# Altium PCB middlePCB_rev4.PcbDoc
Units mil, origin at the board's own origin, x right, y up, seen from the top; angles counter-clockwise.
Board outline 3939.9 x 3936.9 mil, 2 copper layers (Top Layer, Bottom Layer); 64 components, 67 nets, 276 pads, 222 vias.
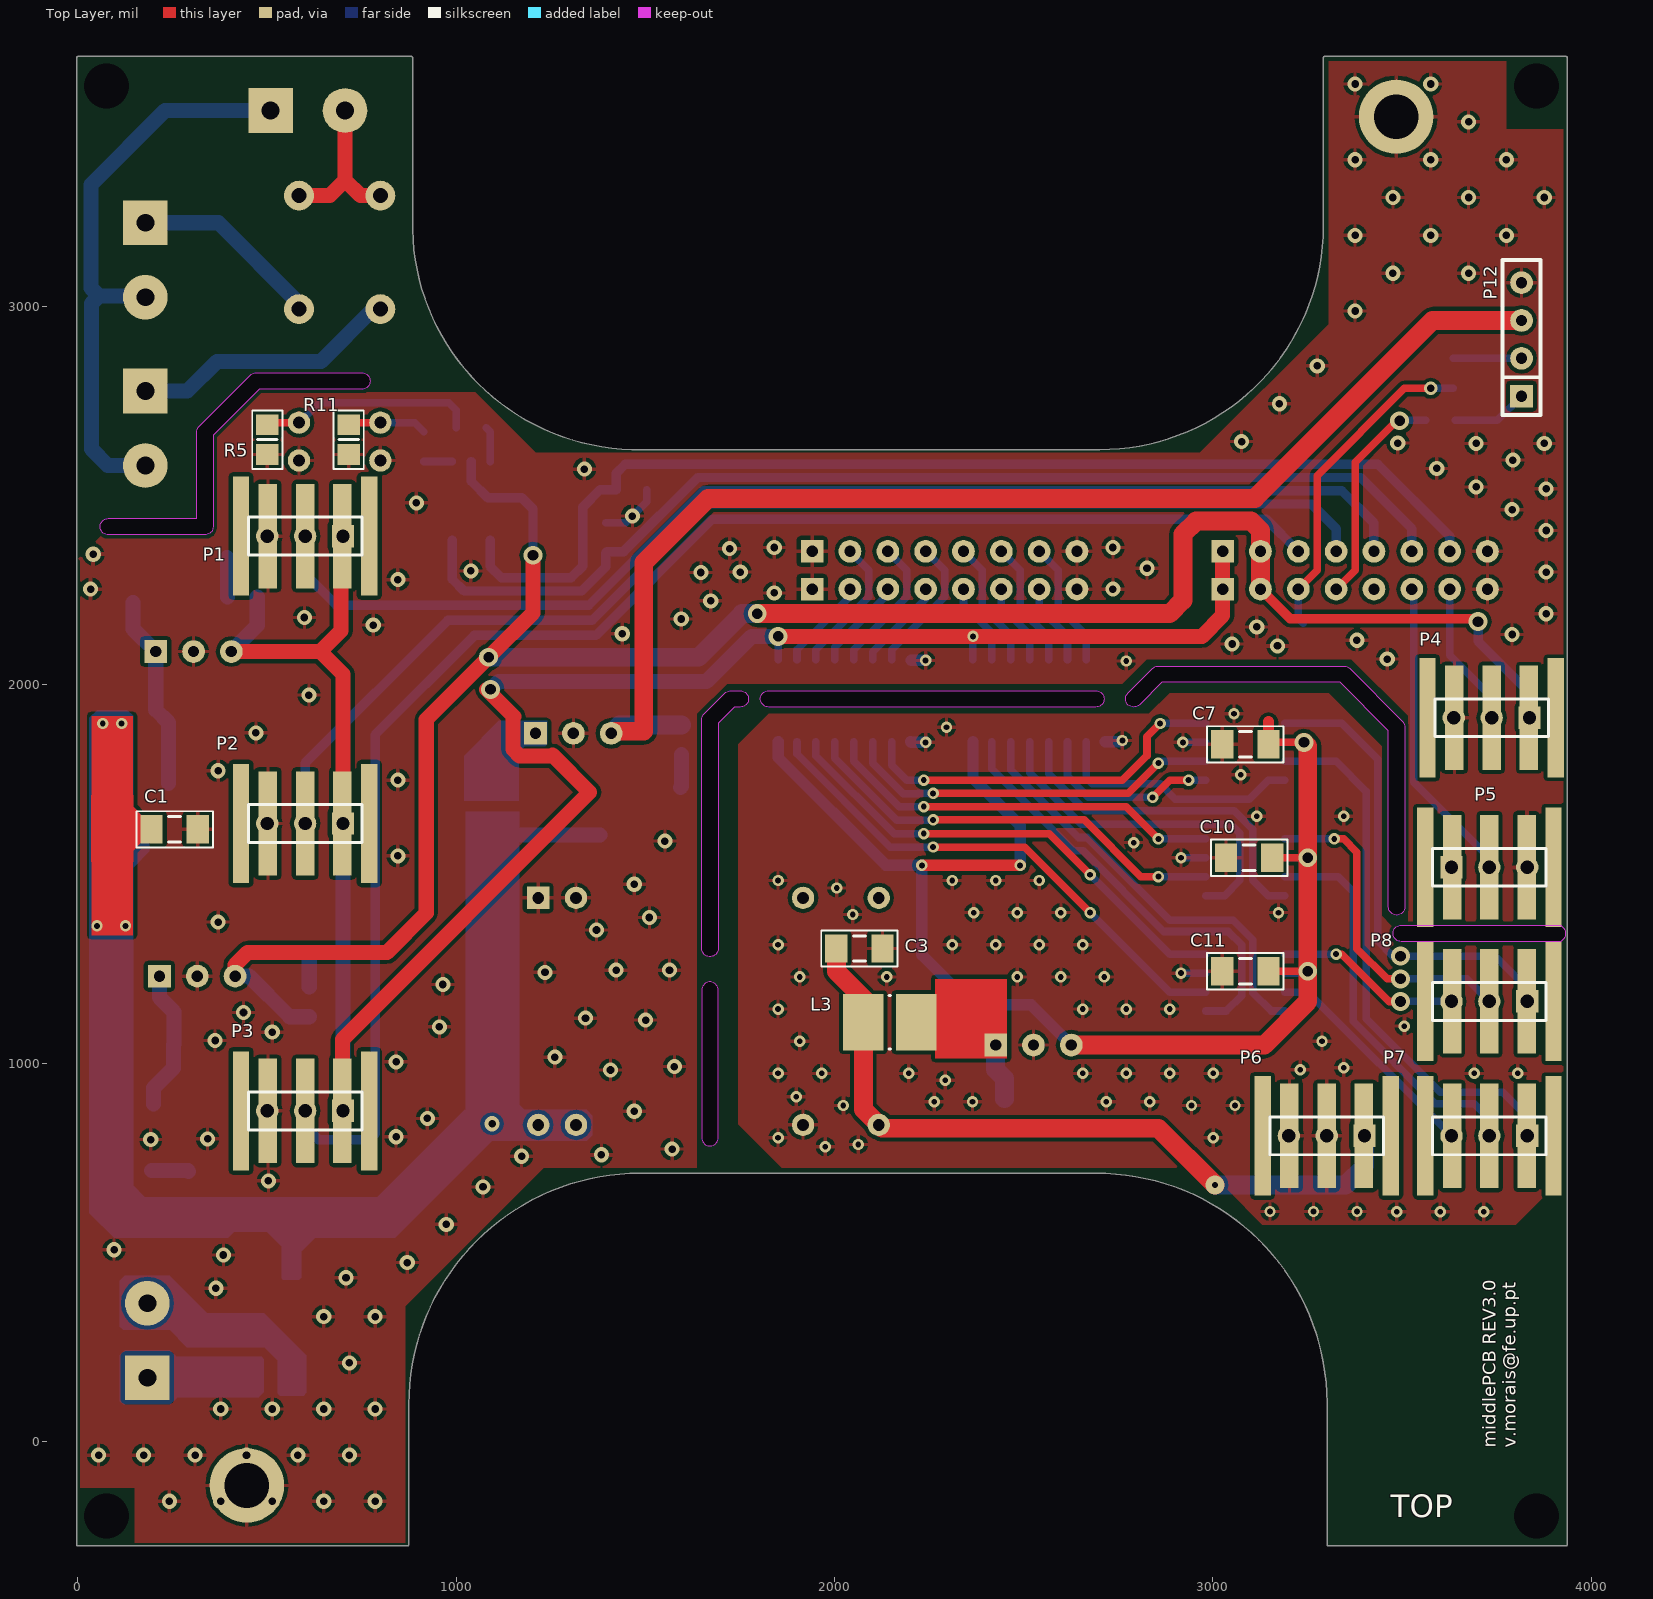
[diagram p0: Top Layer view]
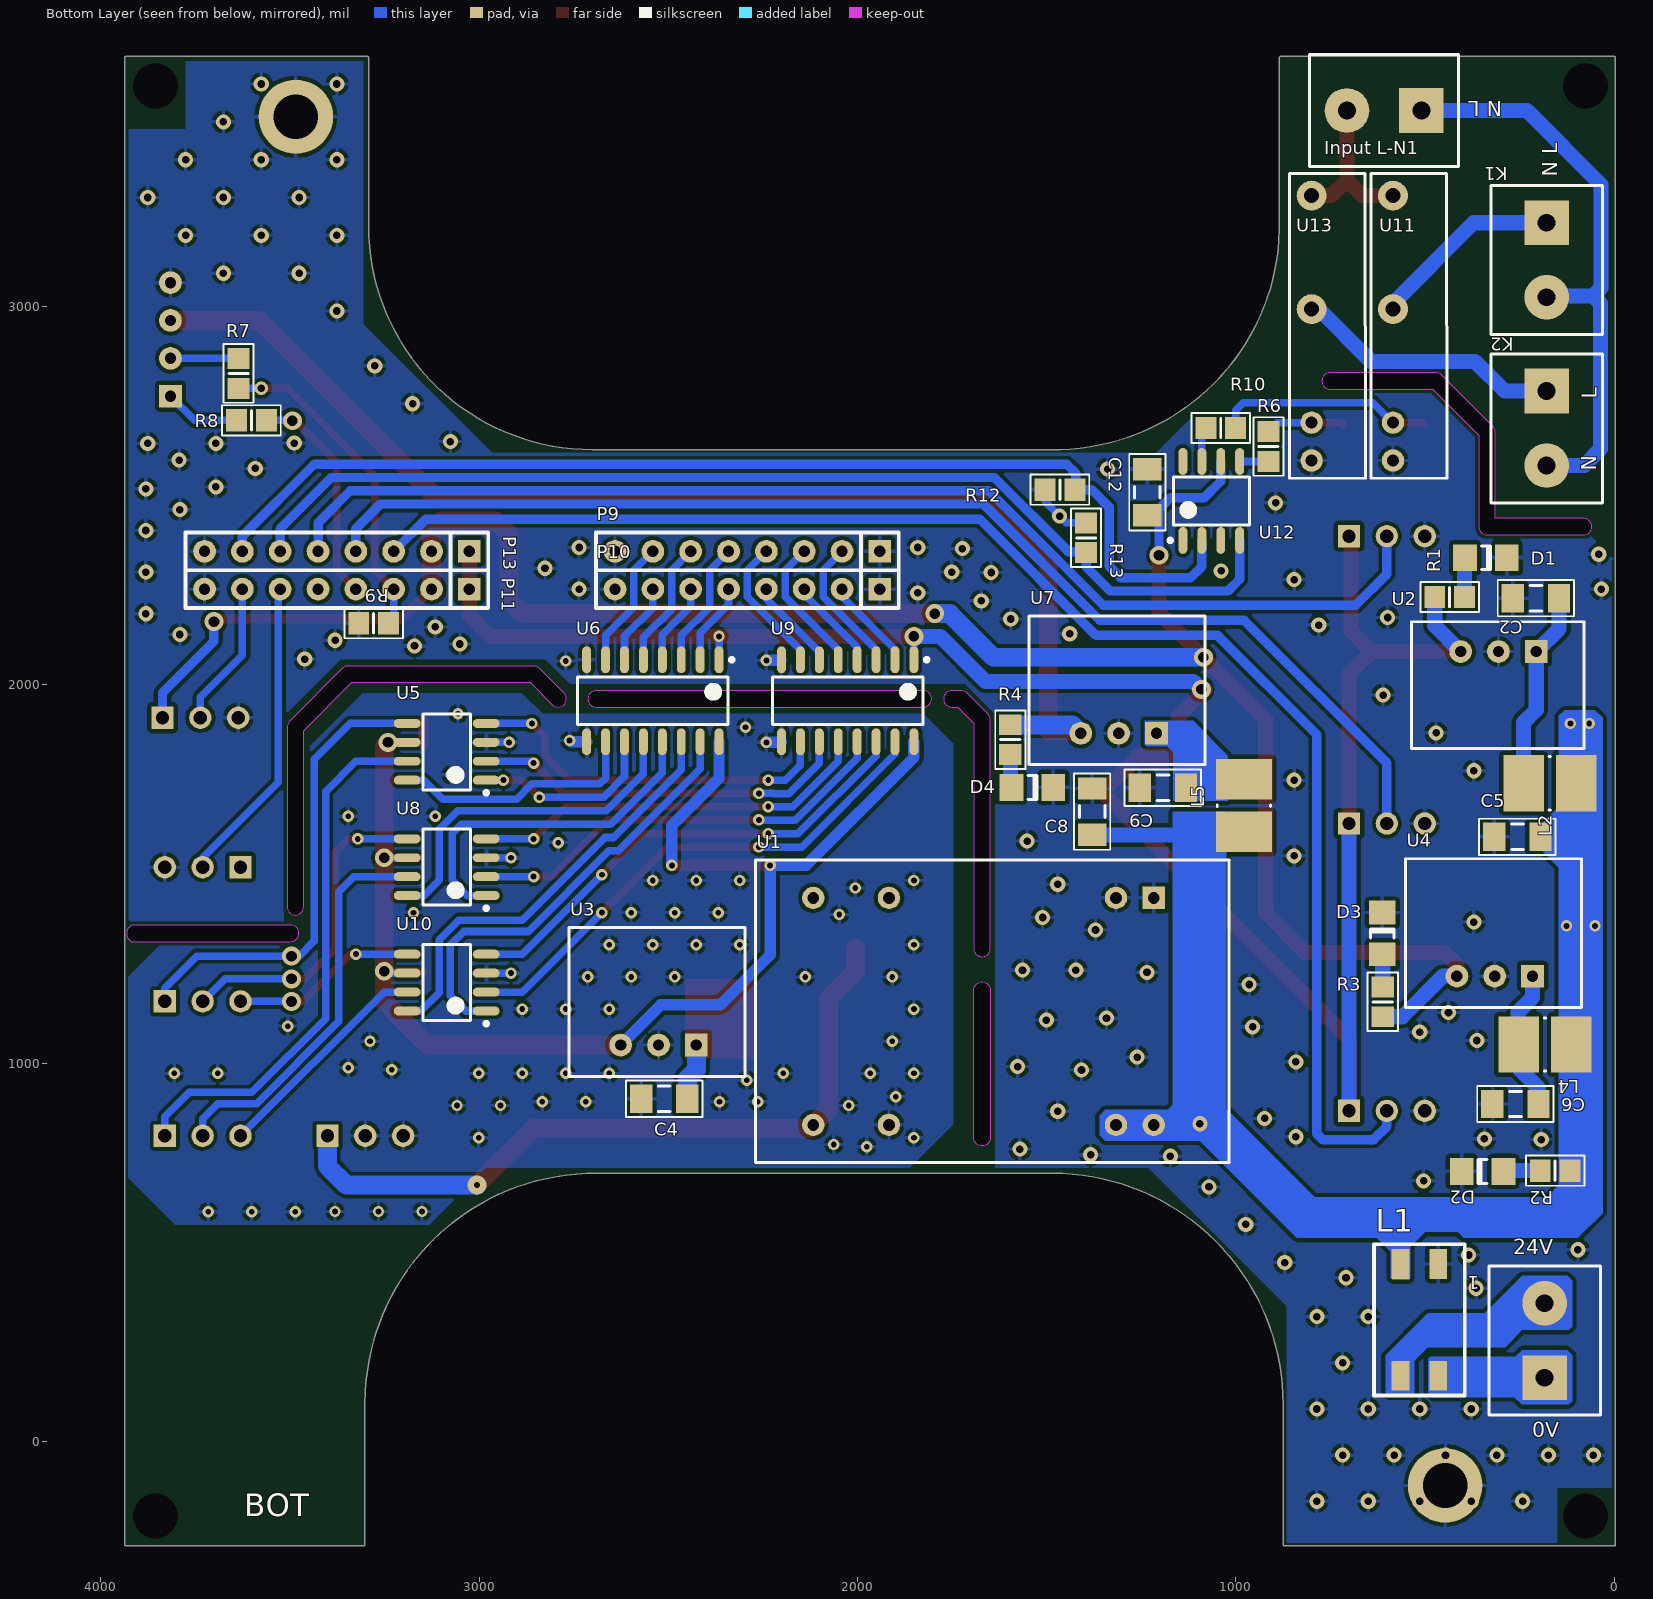
[diagram p1: Bottom Layer view, seen from below]
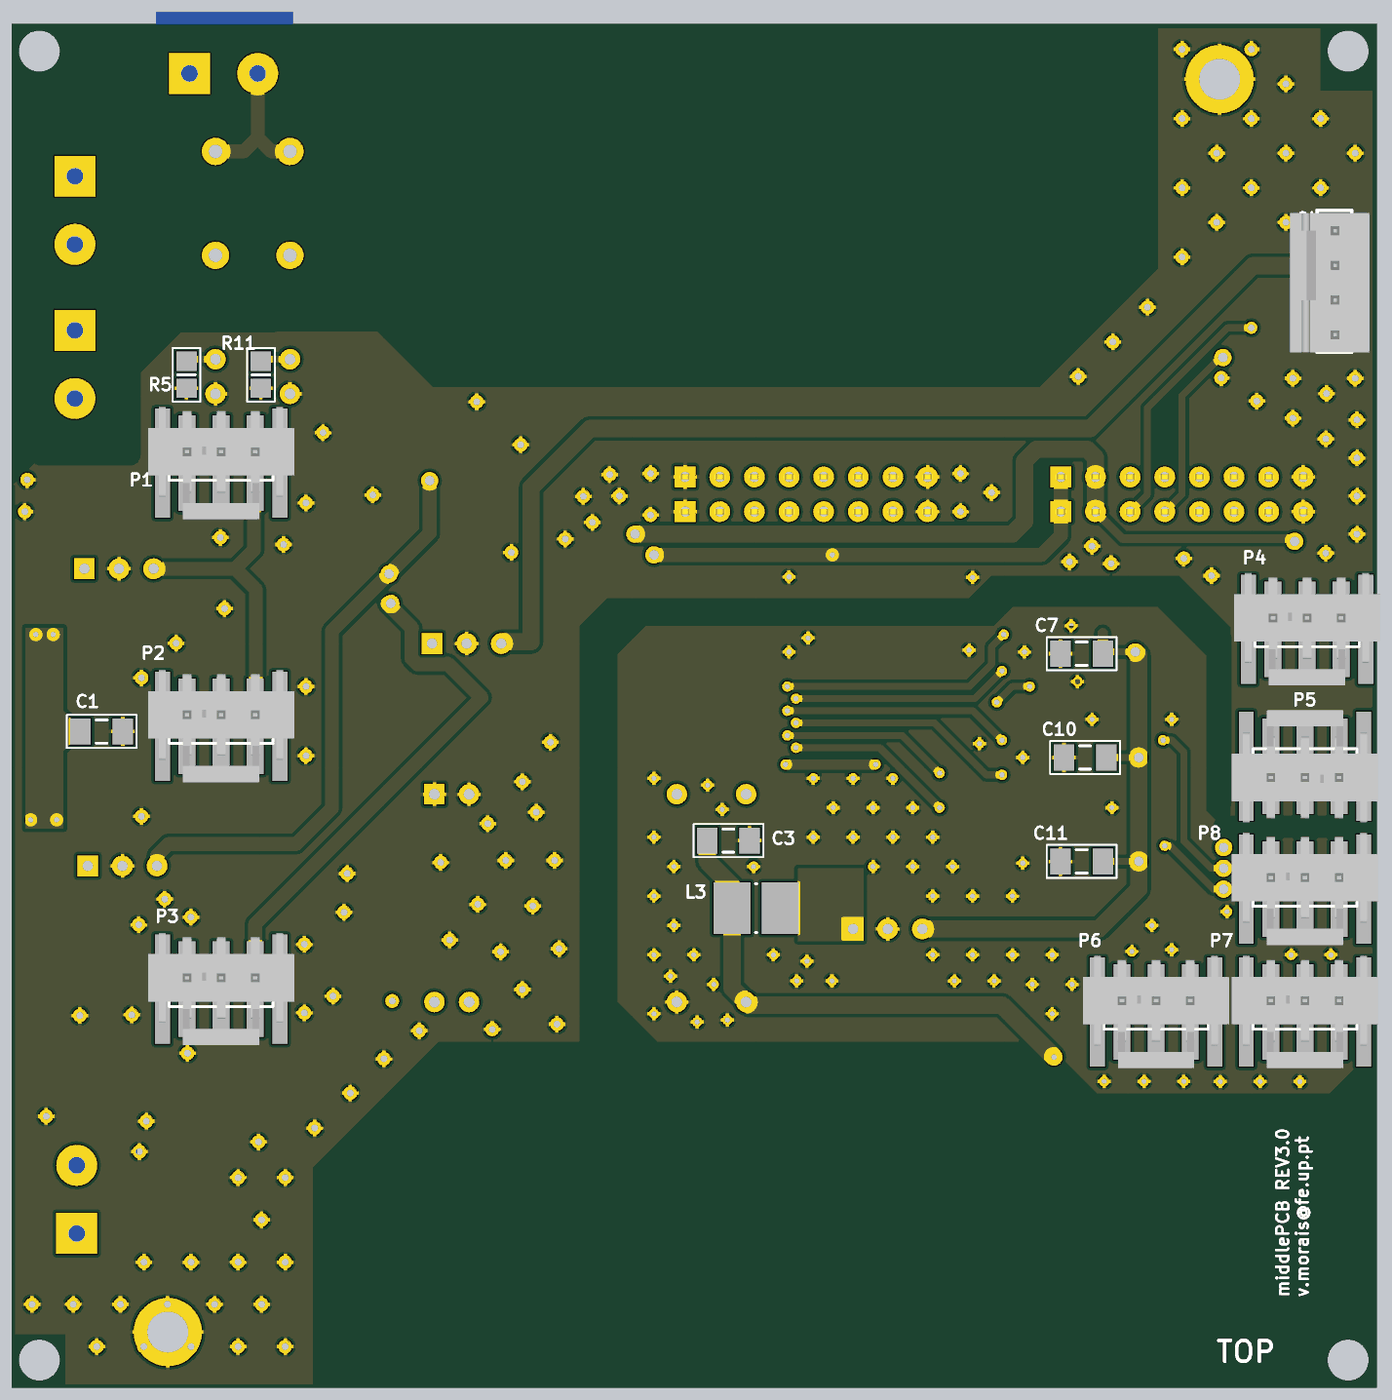
[diagram p2: 3D render of the assembled board from above, using the file's embedded part models]

## Layer stack, top to bottom
Top Solder: solder mask 0.4, Solder Resist, Dk 3.5
Top Layer: signal copper 1.4
Dielectric 1: dielectric 12.6, FR-4, Dk 4.8
Bottom Layer: signal copper 1.4
Bottom Solder: solder mask 0.4, Solder Resist, Dk 3.5

## Board outline
1,-275.95 871,-275.95 ccw(c871,-272) 874.95,-272 874.95,98 cw(c1486,98) 1486,709.05 2691,709.05 ccw(c2691,713) 2691.02,709.05 cw(c2693.5,100.5) 3302.05,102.99 3302.05,-272 ccw(c3306,-272) 3306,-275.95 3933,-275.95 ccw(c3933,-272) 3936.95,-272 3936.95,3657 ccw(c3933,3657) 3933,3660.95 3296,3660.95 ccw(c3296,3657) 3292.05,3657 3292.05,3210.51 cw(c2702.25,3211.75) 2701.01,2621.95 ccw(c2701,2618) 2701,2621.95 1491,2621.95 ccw(c1491,2618) 1490.92,2621.95 cw(c1478.5,3215.5) 884.95,3203.04 cw(c1478.5,3215.5) 884.95,3203.08 884.95,3203 884.95,3657 ccw(c881,3657) 881,3660.95 1,3660.95 ccw(c1,3657) -2.92,3656.5 ccw(c1,3656) -2.95,3656 -2.95,-272 ccw(c1,-272)
cut-out: 2806.32,1947.68 cw(c2791,1963) 2775.68,1978.32 2840.68,2043.32 cw(c2855.97,2028.06) 2856,2049.67 3346,2049.67 cw(c3346,2028) 3361.36,2043.29 3501.32,1903.32 cw(c3486.06,1888.03) 3507.67,1888 3507.67,1413 cw(c3486,1413) 3464.33,1413 3464.33,1879.02 3337.02,2006.33 2864.98,2006.33
cut-out: 1826,1941.33 cw(c1826,1963) 1826,1984.67 2691,1984.67 cw(c2691,1963) 2712.67,1963 cw(c2691,1963) 2691,1941.33
cut-out: 1649.33,803 ccw(c1671,803) 1692.67,803 1692.67,1193 ccw(c1671,1193) 1649.33,1193
cut-out: 3498.27,1321.33 cw(c3498.27,1343) 3498.27,1364.67 3919,1364.67 cw(c3907.42,1343) 3919,1321.33
cut-out: 81,2396.33 cw(c81,2418) 81,2439.67 314.33,2439.67 314.33,2668 cw(c336,2668) 320.71,2683.36 455.68,2818.32 cw(c470.97,2803.06) 471,2824.67 751,2824.67 cw(c751,2803) 772.67,2803 cw(c751,2803) 751,2781.33 479.98,2781.33 357.67,2659.02 357.67,2418 cw(c336,2418) 336,2396.33
cut-out: 1649.33,1303 1649.33,1908 cw(c1671,1908) 1655.71,1923.36 1655.68,1923.32 1710.68,1978.32 1710.64,1978.29 cw(c1726,1963) 1726,1984.67 1751,1984.67 cw(c1751,1963) 1772.67,1963 cw(c1751,1963) 1751,1941.33 1734.98,1941.33 1692.67,1899.02 1692.67,1303 cw(c1671,1303)

## Design rules (kind name [scope] priority, off if disabled: settings)
Clearance [All] p1: gap=10 ignorepadtopadclearanceinfootprint=FALSE
Height [All] p1: minheight=0 maxheight=10000 prefheight=500
HoleSize [All] p1: absolutevalues=TRUE maxlimit=1000 minlimit=7.87 maxpercent=80.000 minpercent=20.000
PlaneClearance [All] p1: clearance=100
PolygonConnect [All] p1: connectstyle=Relief reliefconductorwidth=10 reliefentries=4 polygonreliefangle="90 Angle" airgapwidth=10
RoomDefinition middlePCB_rev4 [InComponentClass('middlePCB_rev4')] p1: confinementstyle=ConfineIn formatcopy=TRUE lockcomponents=FALSE outline -1641.05,-3603.5 358.95,-3603.5 358.95,-2603.5 -1641.05,-2603.5
RoutingVias [All] p1: holewidth=28 width=50 viastyle="Through Hole" minholewidth=28 minwidth=50 maxholewidth=28 maxwidth=50
SilkToSilkClearance [All] p1: silktosilkclearance=1
SilkToSolderMaskClearance [IsPad] p1: minsilkscreentomaskgap=1 clearancetoexposedcopper=TRUE
SolderMaskExpansion [All] p1: expansion=4
Width [All] p1: maxlimit=150 minlimit=5 preferedwidth=20
25 further rules are at their usual default settings.

## Components (designator, comment, footprint, x,y, rotation, side; value= is the part's Value field where it differs from the comment)
1 "P 2p 5mm" connector1x2_parafuso 184,267 r90 bottom
C1 "C 10uF 1206 MLCC 50V X5R" CAPC_1206 256,1618 r180 top
C2 "C 10uF 1206 MLCC 50V X5R" CAPC_1206 207,2229 r180 bottom
C3 "C 10uF 1206 MLCC 50V X5R" CAPC_1206 2066,1303 r180 top
C4 "C 10uF 1206 MLCC 50V X5R" CAPC_1206 2511,906 r180 bottom
C5 "C 10uF 1206 MLCC 50V X5R" CAPC_1206 256,1598.31 r180 bottom
C6 "C 10uF 1206 MLCC 50V X5R" CAPC_1206 261,892 r180 bottom
C7 "C 10uF 1206 MLCC 50V X5R" CAPC_1206 3086,1842.68 r0 top
C8 "C 10uF 1206 MLCC 50V X5R" CAPC_1206 1380,1665 r270 bottom
C9 "C 10uF 1206 MLCC 50V X5R" CAPC_1206 1193,1728 r180 bottom
C10 "C 10uF 1206 MLCC 50V X5R" CAPC_1206 3096,1543 r0 top
C11 "C 10uF 1206 MLCC 50V X5R" CAPC_1206 3086,1243 r0 top
C12 "C 10uF 1206 MLCC 50V X5R" CAPC_1206 1234,2509 r270 bottom
D1 "IC LED 1206" DIODE_1206 339.12,2336 r180 bottom
D2 "IC LED 1206" DIODE_1206 348,714 r0 bottom
D3 "IC LED 1206" DIODE_1206 613,1343 r90 bottom
D4 "IC LED 1206" DIODE_1206 1538,1729 r180 bottom
"Input L-N1" "P 2p 5mm" connector1x2_parafuso 608.13,3518 r0 bottom
K1 "P 2p 5mm" connector1x2_parafuso 178.67,3123 r270 bottom
K2 "P 2p 5mm" connector1x2_parafuso 178.67,2678 r270 bottom
L1 "L 2A CM" FILTER-SMD_4P-L9.2-W6.0-TL 515,321.36 r90 bottom
L2 "IND RLS-126" "Inductor - RLS-126" 170,1740 r0 bottom
L3 "IND RLS-126" "Inductor - RLS-126" 2146,1108 r0 top
L4 "IND RLS-126" "Inductor - RLS-126" 183,1049 r0 bottom
L5 "IND RLS-126" "Inductor - RLS-126" 979,1681 r90 bottom
P1 "P 8p 2.54 SR DW 3P" MOLEX_3p_105431_1103 601,2393 r180 top locked
P2 "P 8p 2.54 SR DW 3P" MOLEX_3p_105431_1103 601,1633.5 r180 top locked
P3 "P 8p 2.54 SR DW 3P" MOLEX_3p_105431_1103 601,874 r180 top locked
P4 "P 8p 2.54 SR DW 3P" MOLEX_3p_105431_1103 3737,1913 r180 top locked
P5 "P 8p 2.54 SR DW 3P" MOLEX_3p_105431_1103 3731,1518 r0 top locked
P6 "P 8p 2.54 SR DW 3P" MOLEX_3p_105431_1103 3301,808 r180 top locked
P7 "P 8p 2.54 SR DW 3P" MOLEX_3p_105431_1103 3731,808 r180 top locked
P8 "P 8p 2.54 SR DW 3P" MOLEX_3p_105431_1103 3731,1163.41 r180 top locked
P9 "P 8p 2.54 SR DW 8P" "Header 8x1 8.5mm" 1941,2353 r0 bottom
P10 "P 8p 2.54 SR DW 8P" "Header 8x1 8.5mm" 1941,2253 r0 bottom
P11 "P 8p 2.54 SR DW 8P" "Header 8x1 8.5mm" 3026,2253 r0 bottom
P12 "P 4p 2.54 MOL FAN" "HEADER 4p molex" 3816,2763 r90 top
P13 "P 8p 2.54 SR DW 8P" "Header 8x1 8.5mm" 3026,2353 r0 bottom
R1 "R 150 1/8W 0805 1%" RESC_0805 435,2232 r0 bottom
R2 "R 2k7 1/8 0805 1%" RESC_0805 156,716 r180 bottom
R3 "R 330 1/8 0805 1%" RESC_0805 612,1162 r270 bottom
R4 "R 1k2 1/8 0805 1%" RESC_0805 1596,1855 r90 bottom
R5 "R 0 1/8W 0805" RESC_0805 501,2648 r270 top
R6 "R 10 1/8W 0805 1%" RESC_0805 914,2630 r90 bottom
R7 "R 0 1/8W 0805" RESC_0805 3636,2823 r270 bottom
R8 "R 0 1/8W 0805" RESC_0805 3602,2699 r180 bottom
R9 "R 0 1/8W 0805" RESC_0805 3279,2163 r180 bottom
R10 "R 10 1/8W 0805 1%" RESC_0805 1040,2679 r180 bottom
R11 "R 0 1/8W 0805" RESC_0805 716,2648 r270 top
R12 "R 0 1/8W 0805" RESC_0805 1465,2516.06 r180 bottom
R13 "R 0 1/8W 0805" RESC_0805 1396,2388.69 r270 bottom
U1 "IC DC/DC 15V ISO" "MeanWell SCWNo6" 1217,837 r270 bottom
U2 "IC DC/DC 3V3" "DC/DC - R-78E3.3" 79.62,2166.74 r0 bottom
U3 "IC DC/DC 5V" "DC/DC - OKI-78SR-E" 2762.22,965.32 r180 bottom
U4 "IC DC/DC 5V" "DC/DC - OKI-78SR-E" 552.06,1147.32 r180 bottom
U5 "IC Driver 5A Dual ENA IX4340" SOIC-MIC4126 3086,1823 r0 bottom
U6 "IC ISO SI8660" SOIC127P610X155-16N 2541,1958 r270 bottom
U7 "IC DC/DC 12V" "DC/DC - OKI-78SR-E" 1546.22,1789.32 r180 bottom
U8 "IC Driver 5A Dual ENA IX4340" SOIC-MIC4126 3086,1518 r0 bottom
U9 "IC ISO SI8660" SOIC127P610X155-16N 2026,1958 r270 bottom
U10 "IC Driver 5A Dual ENA IX4340" SOIC-MIC4126 3086,1213 r0 bottom
U11 "IC Relay 5A 5V 5x20mm" "Relay - G6DN" 584.79,2693 r90 bottom
U12 "IC DUAL MOS DRIVER MIC4127" SOIC-MIC4126 1065,2486 r90 bottom
U13 "IC Relay 5A 5V 5x20mm" "Relay - G6DN" 799.79,2693 r90 bottom

## Footprints (in the part's own frame and the unit in brackets; to place one, negate y for a bottom-side part, rotate by r counter-clockwise, add the part's x,y. Pads: shape width x height; smd on the part's side, far side on the other; paste and mask are expansions set on the pad)
CAPC_1206 [mm] "Chip Capacitor, Body 3.2x1.6mm, IPC Low Density"
  rect 1.5x1.9 smd: 1(-1.55,0) 2(1.55,0)
  silkscreen extent -2.57,-1.21 2.57,1.21, body extent -1.7,-0.9 1.7,0.9, height 1.35
connector1x2_parafuso [mm] "Connector; Header; 2 Position"
  rect 3x3 hole 1.2: 1(-2.5,0)
  round 3 hole 1.2: 2(2.5,0)
  silkscreen extent -5,-3.75 5,3.75, body extent -4.92,-4.53 5.68,4.47, height 14.6
"DC/DC - OKI-78SR-E" [mil]
  rect 60x60 hole 30: 1(336.22,82.68)
  round 60 hole 30: 2(236.22,82.68) 3(136.22,82.68)
  silkscreen extent 0,0 465,393, body extent 8,8 456,385, height 693
"DC/DC - R-78E3.3" [mil]
  rect 60x60 hole 30: 1(126.38,78.74)
  round 60 hole 30: 2(226.38,78.74) 3(326.38,78.74)
  silkscreen extent 0,0 457,335, body extent 8,8 447,325, height 402
DIODE_1206 [mm] "Chip Diode; Body 3.2 x 1.6 mm (LxW typ)"
  rect 1.6x1.8 smd: 1(-1.4,0) 2(1.4,0)
  silkscreen extent -0.3,-0.8 0.3,0.8
FILTER-SMD_4P-L9.2-W6.0-TL [mm]
  rect 2x1.2 smd: 1(-3.75,1.27) 2(-3.75,-1.27) 3(3.75,-1.27) 4(3.75,1.27)
  silkscreen extent -5.08,-3.05 5.08,3.05
"HEADER 4p molex" [mil] "header 4p"
  rect 60x60 hole 30: 1(0,0)
  round 60 hole 30: 2(100,0) 3(200,0) 4(300,0)
  silkscreen extent -50,-50 360,50, body extent -50,-102 352,128, height 407
"Header 8x1 8.5mm" [mil] "Stackable 8 pin header"
  rect 60x60 hole 30: 1(0,0)
  round 60 hole 30: 2(100,0) 3(200,0) 4(300,0) 5(400,0) 6(500,0) 7(600,0) 8(700,0)
  silkscreen extent -50,-50 750,50, body extent -50,-50 750,50, height 335
"Inductor - RLS-126" [mm]
  rect 2.72x3.77 smd: 1(-1.77,0) 2(1.77,0)
  silkscreen extent -0.05,-1.79 0.05,1.79, body extent -2.55,-1.8 2.55,1.8, height 2.6
"MeanWell SCWNo6" [mm]
  rect 1.5x1.5 hole 0.8: 2(-15.24,0)
  round 1.5 hole 0.8: 3(-15.24,-2.54) 9(-15.24,-17.78) 11(-15.24,-22.86) 14(0,-22.86) 16(0,-17.78) 22(0,-2.54) 23(0,0)
  silkscreen extent -17.78,-26.75 2.54,5.08, body extent -17.65,-26.64 2.44,4.95, height 10.2
MOLEX_3p_105431_1103 [mm] "conector 3p 2.5mm"
  rect 1.1x8 smd: 0(-4.305,0) 0(4.305,0)
  rect 1.5x1.5 hole 0.9: 1(-2.54,0)
  rect 1.24x7 smd: 1(-2.5,0) 2(0,0) 3(2.5,0)
  round 1.5 hole 0.9: 2(0,0) 3(2.54,0)
  silkscreen extent -3.81,-1.27 3.81,1.27, body extent -5.36,-4.14 5.36,4.11, height 11.3
"Relay - G6DN" [mm]
  round 1.5 hole 0.8: 1(-2.54,0)
  round 1.5 hole 0.8 paste+0: 2(0,0)
  round 2 hole 1: 3(7.62,0) 4(15.24,0)
  silkscreen extent -3.73,-3.62 16.74,1.49, body extent -3.33,-3.53 16.51,1.42, height 13
RESC_0805 [mm] "Chip Resistor, Body 2.0x1.3mm, IPC Low Density"
  rect 1.4x1.5 smd: 1(-1,0) 2(1,0)
  silkscreen extent -1.96,-1.01 1.96,1.01, body extent -1.07,-0.7 1.08,0.7, height 0.65
SOIC127P610X155-16N [mm] "SOIC, 16-Leads, Body 10,05x3,95mm, Pitch 1,27mm, IPC Medium Density"
  oval 1.8x0.6 smd: 1(-2.75,4.445) 2(-2.75,3.175) 3(-2.75,1.905) 4(-2.75,0.635) 5(-2.75,-0.635) 6(-2.75,-1.905) 7(-2.75,-3.175) 8(-2.75,-4.445) 9(2.75,-4.445) 10(2.75,-3.175) 11(2.75,-1.905) 12(2.75,-0.635) 13(2.75,0.635) 14(2.75,1.905) 15(2.75,3.175) 16(2.75,4.445)
  silkscreen extent -2.87,-5.05 1.6,5.42, body extent -3.08,-5.05 3.08,5.05, height 1.55
SOIC-MIC4126 [mm] "SOIC, 8-Leads, Body 5,08x3,95mm, Pitch 1,27mm, IPC Medium Density"
  oval 1.8x0.6 smd: 1(-2.65,1.905) 2(-2.65,0.635) 3(-2.65,-0.635) 4(-2.65,-1.905) 5(2.65,-1.905) 6(2.65,-0.635) 7(2.65,0.635) 8(2.65,1.905)
  silkscreen extent -2.77,-2.55 1.6,2.88, body extent -2.83,-2.55 2.83,2.55, height 1.55

## Part data
1 "Input L-N1" K1 K2: library part gen_purpose_conn_1x2, "Bloques de terminales de PCB de perfil estándar RS de 5,0 mm", Price=0,24, RS VPN=896-6696
C1 C2 C3 C4 C5 C6 C7 C8 C9 C10 C11 C12: library part "Capacitor SMD", "Capacitores de cerâmica multicamada MLCC - SMD/SMT 1206 50V 10uF 20% X5R", LCSC PART #=C13585, Mouser VPN=963-UMK316BBJ106ML-T, Price=0,31
D1 D2 D3 D4: library part LED, "LEDs padrão - SMD GREEN WATER CLEAR", LCSC PART #=C88326, Mouser VPN=604-APT3216SGC, Price=0,387
L1: library part CPFC74NP-PS02H2A20, "COMMON MODE CHOKES / FILTERS POWER LINE 2A SMD-4 ROHS", LCSC PART #=C261397
L2 L3 L4 L5: library part Inductor, "Indutores fixos Line Inductors for RECOM Power Supply", Mouser VPN=919-RLS-126, Price=0,549
P1 P2 P3 P4 P5 P6 P7 P8: library part "Header 3", "Distribuidores e Alojamento de Fios CGrid Hrd SRDW THo le 8ckt", Mouser VPN=538-87937-0800, Price=0,621
P9 P10 P11 P13: library part jumper_8p, "Distribuidores e Alojamento de Fios CGrid Hrd SRDW THo le 8ckt", Mouser VPN=538-87937-0800, Price=0,621
P12: library part "Header 4p molex", "Distribuidores e Alojamento de Fios 4 PIN HEADER WITH FR R WITH FRICTION LOCK", Mouser VPN=538-47053-3000, Price=0,405
R1: library part Resistor, "Resistores de Filme Espesso - SMD 1/8watt 150ohms 1% 100ppm", LCSC PART #=C17471, Mouser VPN=71-CRCW0805-150-E3, Price=0,09
R2: library part Resistor, "Resistores de Filme Espesso - SMD 1/8watt 2.7Kohms 1% 100ppm", LCSC PART #=C17530, Mouser VPN=71-CRCW0805-2.7K-E3, Price=0,09
R3: library part Resistor, "Resistores de Filme Espesso - SMD 1/8Watt 330ohms 1% Commercial Use", LCSC PART #=C17630, Mouser VPN=71-CRCW0805330RFKEAC, Price=0,09
R4: library part Resistor, "Resistores de Filme Espesso - SMD 1/8watt 1.2Kohms 1%", LCSC PART #=C17379, Mouser VPN=71-CRCW08051K20FKEA, Price=0,09
R5 R7 R8 R9 R11 R12 R13: library part Resistor, "Resistores de Filme Espesso - SMD 1/8Watt 0ohms Commercial Use", LCSC PART #=C17477, Mouser VPN=71-CRCW08050000Z0EAC, Price=0,09
R6 R10: library part Resistor, "Resistores de Filme Espesso - SMD 1/8Watt 10ohms 1% Commercial Use", LCSC PART #=C17415, Mouser VPN=71-CRCW080510R0FKEAC, Price=0,09
U1: library part "MEANWELL - SCWN06", "Conversores CC/CC com isolação 6W 18-36Vin 15Vout 400mA DIP24 Iso", Mouser VPN=709-SCWN06B-15, Price=8,26
U2: library part "DC/DC - R-78E3.3", "Conversores CC/CC sem isolação 3.3V 500MA OUT THRU", Mouser VPN=919-R-78E3.3-0.5, Price=2,43
U3 U4: library part "DC/DC - R-78E3.3", "Conversores CC/CC sem isolação 7-36Vin 5Vout 1.5A VSIP Encapsulated", Mouser VPN=580-OK78SR5/1.5W36EC, Price=5,31
U5 U8 U10: library part "Driver - IX4340", "Drivers de portas Dual 5A Gate Driver IC", LCSC PART #=C138519, Equivalente=UCC27424DR, Mouser VPN=747-IX4340NETR, Price=0,891
U6 U9: library part "ISO SI8660", "Isoladores digitais 1 kV 6-channel digital isolator", Mouser VPN=634-SI8660BA-B-IS1, Price=1,82
U7: library part "DC/DC - R-78E3.3", "Conversores CC/CC sem isolação 15-36Vin 12Vout 1.0A VSIP Encapsulated", Mouser VPN=580-OKI78SR12/1W36EC, Price=5,31
U11 U13: library part "Relay - G6DN", "Relés para uso geral 1 form A w/ 5VDC Coil-standard type", Mouser VPN=653-G6DN-1A-LDC5, Price=1,59
U12: library part MOS_DRIVER-MIC4126, "Drivers de portas 1.5A Dual High Speed MOSFET Driver with Low Thermal Impedance", LCSC PART #=C20551, Equivalente=TC4427AEOA, Mouser VPN=998-MIC4126YME, Price=0,756

## Free pads (board coordinates)
  round 60 hole 118.11 unplated: 4(76,-197) 4(76,3582.53) 4(3855.53,-197) 4(3855.53,3582.53)
  round 196.85 hole 118.11: 5(447,-116) 5(3484.53,3501.53)

## Via types
v1: diameter 40, hole 20, Top Layer to Bottom Layer, 114 vias
v2: diameter 30, hole 15, Top Layer to Bottom Layer, 64 vias
v3: diameter 30, hole 15.75, Top Layer to Bottom Layer, 29 vias
v4: diameter 50, hole 28, Top Layer to Bottom Layer, 13 vias
v5: diameter 50, hole 15.75, Top Layer to Bottom Layer, 1 vias
v6: diameter 35, hole 20, Top Layer to Bottom Layer, 1 vias

## Nets (pads, with @x,y where several pads share a name; then routed paths per layer and width w, separated by ;. In a path a pad name is that pad's centre, name@x,y a point inside that pad or via, vN(x,y) a via of type N, cw(c..) or ccw(c..) an arc to the next point about the centre after c; other vN are vias at no path point)
3V3: P1.1 P2.1 P3.1 P11.1 P13.1 R1.2 U2.3 U6.1 U9.1 | length 5858.8
  Top Layer w40: U2.3 641,2088 ; P3.1@699.43,874 699.43,1062.43 1353,1716 1254.71,1814.29 1252.43,1812 1167.57,1812 1150,1829.57 1150,1914.43 1152.29,1916.71 1081,1988 v4(1091,1988) ; P2.1@701,1633.5 701,2028 641,2088 ; P1.1@701,2393 696,2388 696,2143 641,2088 ; v4(1851,2128) v3(2366,2128) 2971,2128 3026,2183 P11.1 P13.1
  Bottom Layer w20: U9.1 v4(1851,2128) v4@1851,2133 ; U6.1 v3(2366,2128) v3@2366,2133
  Bottom Layer w40: U2.3 474.37,2156.37 R1.2 ; P3.1@701,874 P2.1@701,1633.5 ; v4(1091,1988) 1112,2009 1662,2009 1781,2128 v4(1851,2128)
3V3GND: C1.1 C2.1 C5.1 C6.1 C8.1 C9.1 C12.1 D1.2 D2.2 D3.2 D4.2 L1.3 P1.3 P2.3 P3.3 P4.3 P5.3 P9.1 P9.8 P10.1 P10.8 P11.8 P12.4 P13.8 pad.5 R5.2 R9.1 R11.2 R12.1 R13.1 U1.2 U1.3 U2.2 U4.2 U6.8 U7.2 U9.8 U11.1 U12.3 U13.1 | length 201.6
  Bottom Layer w20: R13.1 1448,2428.06 v1(1466,2446.06) 1504.37,2484.43 R12.1
  Bottom Layer w30: U9.8@2202.73,2064.54 v3(2241,2064.54)
  other v1: 242,-158 378,-158 514,-158 650,-158 786,-158 55,-36 174,-36 310,-36 446,-36 582,-36 718,-36 378,86 514,86 650,86 786,86 718,208 650,330 786,330 365,405 709,433 871,473 385,493 96,507 974,574 1071,673 504,689 1173,754 1384,758 1571,773 193,798 343,800 841.35,805.7 924,854 1471,873 1408,982 1577,991 841.35,1003.53 1261,1016 363,1060 514,1082 956,1096 1501,1114 1342,1119 438,1134 965,1208 1235,1240 1423,1246 1564,1246 1371,1352 371,1373 1511,1385 1471,1473 846,1548 1552,1587 846,1748 371,1773 471,1873 611,1973 3461,2068 3171,2103 3051,2108 3381,2118 3791,2133 1439,2135 3116,2153 781,2158 1595,2174 599,2178 3881,2188 1673,2222 1841,2243 34,2253 2736,2253 846,2278 1647,2297 1751,2298 3881,2298 1039,2301 2826,2308 41,2345 1723,2360 1841,2363 2736,2363 3881,2408 3791,2463 895,2481 3881,2518 3696,2523 1339,2570 3592,2572 3793,2594 3696,2638 3876,2638 3489,2639 3076,2643 3176,2743 3276,2843 3376,2988 3476,3088 3676,3088 3376,3188 3576,3188 3776,3188 3476,3288 3676,3288 3876,3288 3376,3388 3576,3388 3776,3388 3676,3488 3376,3588 3576,3588
  other v2: 2771,2063
5V: C12.2 P4.1 P11.2 P13.2 R3.2 U4.3 U12.6 | length 5640.9
  Top Layer w25: P11.2 3204,2175 3693,2175 v4(3701,2167)
  Top Layer w40: U4.3 415.84,1259.84 449,1293 817,1293 921,1397 921,1908 v4(1086,2073) 1203.19,2190.18 v4(1203.19,2342.5)
  Top Layer w50: v4(1796,2188) 2886,2188 2921,2223 2921,2398 2956,2433 3101,2433 3126,2408 P13.2 P11.2
  Bottom Layer w25: U12.6 1040,2538 1084,2494 1174,2494 1203.19,2464.81 v4(1203.19,2342.5) ; v4(3701,2167) 3701,2115 3837,1979 P4.1@3837,1913
  Bottom Layer w40: U4.3 453,1230 560.37,1122.63 R3.2
  Bottom Layer w50: v4(1086,2073) 1641,2073 1756,2188 v4(1796,2188)
12V: P12.3 R4.2 U7.3 | length 3312.8
  Top Layer w50: U7.3@1411,1873 1415.37,1877.37 1496,1877.37 1496,2323 1666,2493 3111,2493 3581,2963 P12.3
  Bottom Layer w50: U7.3 1432.37,1894.37 R4.2
24VDC: C1.2 C5.2 C8.2 L1.4 L2.1 L4.1 L5.1 R2.2 U1.22 U1.23 | length 278.3
  Bottom Layer w40: 1101.66,1602.98 C8.2@1380,1602.98
  other v1: 1095,840
  other v3: 51,1363 126,1363 66,1898 116,1898
ena_uh: U5.8 U6.10 | length 664.6
  Bottom Layer w20: U6.10 2666,1753 2681,1738 2861,1738 2901,1698 3096,1698 3146,1748 U5.8
ena_ul: U5.1 U6.11 | length 504.1
  Top Layer w20: v3(2841,1702.64) 2886.36,1748 v3(2936,1748)
  Bottom Layer w20: U6.11 2616,1758 2671.36,1702.64 v3(2841,1702.64) ; v3@2931,1748 v3(2936,1748) U5.1
ena_vh: U6.12 U8.8 | length 921.3
  Bottom Layer w20: U6.12 2566,1765.57 2664.28,1667.29 3056.95,1667.29 3106,1618.24 3106,1483 3146,1443 U8.8
ena_vl: U6.13 U8.1 | length 933.9
  Bottom Layer w20: U6.13 2516,1768 2652.07,1631.93 3047.07,1631.93 3071,1608 3071,1483 3031,1443 U8.1
ena_wh: U6.14 U10.8 | length 1144.5
  Bottom Layer w20: U6.14 2466,1775.57 2644.99,1596.58 2667.42,1596.58 2886,1378 3053.82,1378 3106,1325.82 3106,1185.99 3153.99,1138 U10.8
ena_wl: U6.15 U10.1 | length 1170.5
  Bottom Layer w20: U6.15 2416,1778 2632.78,1561.22 2657.78,1561.22 2871,1348 3041.39,1348 3076,1313.39 3076,1178 3036,1138 U10.1
I_U: P1.2 P13.5 | length 3194.7
  Bottom Layer w25: P1.2@601,2393 601,2293 683.5,2210.5 1350.51,2210.5 1653.01,2513 3341,2513 3426,2428 P13.5
I_V: P2.2 P13.4 | length 3255.2
  Bottom Layer w25: P2.2@601,1633.5 601,1793 978.5,2170.5 1360,2170.5 1667.5,2478 3261,2478 3326,2413 P13.4
I_W: P3.2 P13.3 | length 4013
  Bottom Layer w25: P3.2@601,874 601,833 636,798 771,798 786,813 786,1868 1048.5,2130.5 1369.5,2130.5 1677,2438 3141,2438 P13.3
IN_UH: P8.1 U5.5 | length 1246.4
  Bottom Layer w20: U5.5 3341,1898 3436,1803 3436,1323 3476,1283 v4(3496,1283) 3746,1283 3831,1198 P8.1@3831,1163.41
IN_UL: P7.1 U5.7 | length 1431.6
  Bottom Layer w20: U5.7 3326,1798 3406,1718 3406,1117.85 3600.85,923 3766,923 3831,858 P7.1@3831,808
IN_VH: P8.2 U8.5 | length 868
  Top Layer w20: v3(3321,1593) 3346,1593 3381,1558 3381,1303 3461,1223 v4(3496,1223)
  Bottom Layer w20: U8.5 v3(3321,1593) ; v4(3496,1223) 3671.41,1223 P8.2@3731,1163.41
IN_VL: P7.2 U8.7 | length 1051.4
  Bottom Layer w20: U8.7 3331,1493 3371,1453 3371,1110.42 3588.42,893 3691,893 3731,853 P7.2@3731,808
IN_WH: P8.3 U10.5 | length 501.8
  Top Layer w20: v3(3326,1288) 3341,1288 3466,1163 v4(3496,1163)
  Bottom Layer w20: U10.5 v3(3326,1288) ; v4(3496,1163) 3491.83,1163 3491.41,1163.41 P8.3@3631,1163.41
IN_WL: P7.3 U10.7 | length 598.1
  Bottom Layer w20: U10.7 3251,1188 P7.3@3631,808
ISO_5gnd: C3.1 C4.1 C7.1 C10.1 C11.1 P6.2 P6.3 U1.16 U3.2 U5.3 U6.9 U8.3 U9.9 U10.3 | length 284.1
  Bottom Layer w20: v3@2911,1238 v3(2916,1238) U10.3 ; v3(2916,1543) U8.3 ; v3(2921,1848) U5.3
  Bottom Layer w30: U9.9 2202.73,1848 v3(2241,1848) ; U6.9 2757.73,1849.73 v3(2761,1853)
  other v2: 3151,608 3266,608 3381,608 3486.25,607.05 3601.25,607.05 3716.25,607.05 1975.75,779.45 2062.98,784.98 1851,803 3001,803 2023.5,888 2943.5,888 3058.5,888 2263.5,898 2365,898 2718.5,898 2833.5,898 1898.75,911.55 2292.98,954.98 1851,973 1966,973 2196,973 2656,973 2771,973 2886,973 3001,973 3691,973 3806,973 3231,983 3346,988 1908.5,1058 3288.5,1058 3506,1098 1851,1143 2656,1143 2771,1143 2886,1143 1908.5,1228 2138.5,1228 2483.5,1228 2598.5,1228 2713.5,1228 1851,1313 2311,1313 2426,1313 2541,1313 2656,1313 2048,1393 2368.5,1398 2483.5,1398 2598.5,1398 3173.5,1398 2006,1463 1851,1483 2311,1483 2426,1483 2541,1483 2791,1583 3116,1653 3346,1653 3074.19,1761.98 2296,1888 3056,1923.39
ISO_5V: C7.2 C10.2 C11.2 U3.3 U5.6 U6.16 U8.6 U9.16 U10.6 | length 3802.3
  Top Layer w20: C11.2 3152.02,1238 3157.02,1243 v4(3251,1243) ; C7.2 3152.34,1848 v4(3241,1848) ; C10.2 v4(3251,1543)
  Top Layer w30: v3(2231,1523) v3(2491,1523) ; C7.2 3147.02,1901.98
  Top Layer w50: U3.3 3136,1048 3251,1163 v4(3251,1243) v4(3251,1543) 3251,1838 v4(3241,1848)
  Bottom Layer w20: U10.6 3246,1238 v4(3251,1243) ; U8.6 v4(3251,1543) ; U5.6 v4(3241,1848)
  Bottom Layer w30: U9.16 1851,1808 2136,1523 v3(2231,1523) 2231,1286 2363,1154 2520,1154 U3.3 ; U6.16 2366,1753 2491,1628 v3(2491,1523)
ISO_15V: C3.2 L3.1 P6.1 U1.14 | length 1963
  Top Layer w50: C3.2 2004.98,1243.02 2076.31,1171.68 L3.1 2076.31,877.68 U1.14 2126,828 2856,828 v5(3006,678)
  Bottom Layer w50: v5(3006,678) 3351,678 3401,728 P6.1@3401,808
iso_ENA_UH: P9.7 U6.7 | length 338.5
  Bottom Layer w20: P9.7 2591,2303 2591,2205.43 2666,2130.43 U6.7
iso_ENA_UL: P10.7 U6.6 | length 217.8
  Bottom Layer w20: P10.7 2541,2203 2616,2128 U6.6
iso_ENA_VH: P9.6 U6.5 | length 333.4
  Bottom Layer w20: P9.6 2491,2303 2491,2205.43 ; 2491,2200.28 2566,2125.28 U6.5
iso_ENA_VL: P10.6 U6.4 | length 217.8
  Bottom Layer w20: P10.6 2441,2207.85 2516,2132.85 U6.4
iso_ENA_WH: P9.5 U6.3 | length 338.5
  Bottom Layer w20: P9.5 2391,2303 2391,2205.43 2466,2130.43 U6.3
iso_ENA_WL: P10.5 U6.2 | length 217.8
  Bottom Layer w20: P10.5 2341,2213 2416,2138 U6.2
iso_PWM_UH: P9.4 U9.7 | length 365.4
  Bottom Layer w20: U9.7 2151,2092.29 2291,2232.29 2291,2303 P9.4
iso_PWM_UL: P10.4 U9.6 | length 244.7
  Bottom Layer w20: U9.6 2101,2088 2241,2228 P10.4
iso_PWM_VH: P9.3 U9.5 | length 365.4
  Bottom Layer w20: U9.5 2051,2092.29 2191,2232.29 2191,2303 P9.3
iso_PWM_VL: P10.3 U9.4 | length 244.7
  Bottom Layer w20: U9.4 2001,2099.86 2141,2239.86 P10.3
iso_PWM_WH: P9.2 U9.3 | length 365.4
  Bottom Layer w20: U9.3 1951,2092.29 2091,2232.29 2091,2303 P9.2
iso_PWM_WL: P10.2 U9.2 | length 244.7
  Bottom Layer w20: U9.2 1901,2093 2041,2233 P10.2
Net1_1: 1.1 L1.2
Net1_2: 1.2 L1.1
NetC2_2: C2.2 L2.2 U2.1 | length 516.8
  Bottom Layer w40: C2.2@146,2217.98 146,2148 U2.1 206,1934 239.69,1900.31 L2.2
NetC4_2: C4.2 L3.2 U3.1 | length 151.9
  Bottom Layer w50: U3.1 2426,983 2449.98,959.02 C4.2
NetC6_2: C6.2 L4.2 U4.1 | length 376.2
  Bottom Layer w40: C6.2 199.98,934.49 252.69,987.2 L4.2 254,1050.31 254,1135 215.84,1173.16 U4.1
NetC9_2: C9.2 L5.2 U7.1
NetD1_1: D1.1 R1.1 | length 104.6
  Bottom Layer w40: D1.1 395.63,2334.61 R1.1
NetD2_1: D2.1 R2.1 | length 98.3
  Bottom Layer w40: R2.1 290.88,716 D2.1
NetD3_1: D3.1 R3.1 | length 86.9
  Bottom Layer w40: R3.1 612,1286.88 D3.1
NetD4_1: D4.1 R4.1 | length 87.8
  Bottom Layer w40: D4.1 1596,1731.88 R4.1
"NetInput L-N1_1": "Input L-N1.1" K1.2 K2.2 | length 1561.5
  Bottom Layer w40: K1.2@177.57,3028 K1.2@181,3024.57 ; K2.2 79.43,2579.57 36,2623 36,3008 56,3028 ; K1.2 175.24,3028 56,3028 ; 509.7,3518 231,3518 34.94,3321.94 34.94,3049.06 56,3028
"NetInput L-N1_2": "Input L-N1.2" U11.4 U13.4 | length 433
  Top Layer w40: U11.4 666,3293 706.55,3333.55 ; 706.55,3518 706.55,3333.55 ; U13.4 747.11,3293 706.55,3333.55
NetK1_1: K1.1 U11.3 | length 507.3
  Bottom Layer w40: K1.1@181,3221.43 371.57,3221.43 584.79,3008.21 U11.3
NetK2_1: K2.1 U13.3 | length 708.5
  Bottom Layer w40: K2.1@181,2776.43 289.43,2776.43 367.67,2854.67 642.67,2854.67 781,2993 U13.3
NetP11_3: P11.3 R7.2 R9.2 | length 871.9
  Top Layer w20: P11.3 3276,2303 3276,2553 3506.63,2783.63 v6(3576,2783.63)
  Bottom Layer w20: P11.3 3226,2176.63 R9.2 ; v6(3576,2783.63) R7.2
NetP11_4: P11.4 R8.2 | length 588.3
  Top Layer w20: P11.4 3376,2303 3376,2588 3486,2698 v4(3494,2698)
  Bottom Layer w20: v4(3494,2698) 3495,2699 R8.2
NetR5_1: R5.1 R10.2 U11.2 | length 597.6
  Top Layer w20: R5.1 506.63,2693 U11.2 U11.2@584.79,2711.79
  Bottom Layer w20: U11.2 637.79,2746 980,2746 1000.63,2725.37 R10.2
NetR6_1: R6.1 U12.5 | length 76.1
  Bottom Layer w20: R6.1 914.3,2590.33 U12.5
NetR6_2: R6.2 R11.1 U13.2 | length 210.1
  Top Layer w20: R11.1 721.63,2693 U13.2
  Bottom Layer w20: U13.2 890.37,2693 R6.2
NetR10_1: R10.1 U12.7 | length 93.1
  Bottom Layer w20: R10.1 1090,2668.37 U12.7
PWM_FAN: P12.1 R8.1 | length 201.1
  Bottom Layer w20: R8.1 3752,2699 P12.1
pwm_uh: U5.4 U9.10 | length 1000.4
  Top Layer w20: v3(2236,1748) 2761,1748 2826,1813 2826,1863 v3(2861,1898)
  Bottom Layer w20: U9.10 2151,1788 2191,1748 v3(2236,1748) ; v3(2861,1898) U5.4
pwm_ul: U5.2 U9.11 | length 1006.2
  Top Layer w20: v3(2261,1713) 2776,1713 v3(2856,1793)
  Bottom Layer w20: U9.11 2101,1793 2181.36,1712.64 2221.15,1712.64 2221.5,1713 2250.5,1713 2250.85,1712.64 v3@2261,1712.64 ; v3(2856,1793) 2861,1798 U5.2
pwm_vh: U8.4 U9.12 | length 1067.6
  Top Layer w20: v3(2236,1678) 2771,1678 v3(2856,1593)
  Bottom Layer w20: U9.12 2051,1798 2171.71,1677.29 v3@2236,1677.29 ; v3(2856,1593) U8.4
pwm_vl: U8.2 U9.13 | length 1154.7
  Top Layer w20: v3(2261,1643) 2659.84,1643 2809.84,1493 v3(2856,1493)
  Bottom Layer w20: U9.13 2001,1805.57 2164.64,1641.93 v3@2261,1641.93 ; v3(2856,1493) U8.2
pwm_wh: U9.14 U10.4 | length 1284.8
  Top Layer w20: v3(2236,1606.58) 2567.42,1606.58 v3(2676,1498)
  Bottom Layer w20: U9.14 1951,1813.15 2157.57,1606.58 v3(2236,1606.58) ; v3(2676,1498) 2886,1288 U10.4
pwm_wl: U9.15 U10.2 | length 1373.4
  Top Layer w20: v3(2261,1571.22) 2502.78,1571.22 v3(2676,1398)
  Bottom Layer w20: U9.15 1901,1818 2147.78,1571.22 v3(2261,1571.22) ; v3(2676,1398) 2886,1188 U10.2
Relay_1: P13.7 R12.2 U12.2 | length 2976.4
  Bottom Layer w25: U12.2 1090,2313 1120,2283 1304,2283 1335,2314 1335,2470 1381.06,2516.06 1422.68,2516.06 1422.68,2558.68 1447,2583 3436,2583 3626,2393 P13.7
Relay_2: P13.6 R13.2 U12.4 | length 2915
  Top Layer w25: P13.6 P13.6@3527,2354
  Bottom Layer w25: U12.4 990,2279 1021,2248 1332,2248 1396,2312 R13.2 1398.69,2352 1442.51,2352 1638.51,2548 3391,2548 3526,2413 P13.6
TACH_FAN: P12.2 R7.1 | length 180
  Bottom Layer w20: R7.1@3636,2863 P12.2
temp: P5.2 P11.6 | length 821.1
  Bottom Layer w20: P11.6@3511,2248 3531,2228 3531,1743 3731,1543 P5.2@3731,1518
V_DC: P4.2 P11.7 | length 394.3
  Bottom Layer w20: P11.7@3606,2253 3626,2233 3626,2078 3737,1967 P4.2@3737,1913
pads on no net: P1.0 P2.0 P3.0 P4.0 P5.0 P5.1 P6.0 P7.0 P8.0 P11.5 U1.9 U1.11 U12.1 U12.8

## Polygon pours and split planes (outlines as drawn)
3V3GND on Bottom Layer "Top Layer-No Net" (solid, remove dead copper, pour order 14): 3516,1363 3926,1363 3926,3468 3776,3468 3776,3648 3306,3648 3306,2953 2966,2613 1211,2613 1051,2773 471.64,2773 357.67,2659.02 361,2655.69 361,2393 61,2393 1,2333 6,2328 6,-122 151,-122 151,-267 866,-267 866,358 1231,723 1636,723 1636,1923 1716,2003 2761,2003 2826,2068 3366,2068 3516,1918
ISO_5gnd on Bottom Layer "Top Layer-No Net" (solid, remove dead copper, pour order 20): 3307.57,1978 2887.57,1978 2832.57,1923 1826,1923 1747.57,1844.57 1747.57,838 1862.57,723 2982.57,723 3132.57,573 3802.89,573 3927.57,697.69 3927.57,1228 3834.24,1321.33 3515.42,1321.33 3447.57,1389.18 3447.57,1838
3V3GND on Top Layer "Top Layer-No Net" (solid, remove dead copper, pour order 22): 3516,1363 3926,1363 3926,3468 3776,3468 3776,3648 3306,3648 3306,2953 2966,2613 1211,2613 1051,2773 471.64,2773 357.67,2659.03 361,2655.7 361,2393 61,2393 1,2333 6,2328 6,-122 151,-122 151,-267 866,-267 866,358 1231,723 1636,723 1636,1923 1716,2003 2761,2003 2826,2068 3366,2068 3516,1918
ISO_5gnd on Top Layer "Top Layer-No Net" (solid, remove dead copper, pour order 12): 3306,1978 2886,1978 2831,1923 1826,1923 1746,1843 1746,838 1861,723 2981,723 3131,573 3801.31,573 3926,697.69 3926,1228 3832.67,1321.33 3513.84,1321.33 3446,1389.18 3446,1838

## Other copper
Top Layer:
  rectangle net NetC4_2: 2266,1013 2456,1223
  rectangle net 24VDC: 36,1338 146,1533
  rectangle net 24VDC: 36,1708 146,1918
  region net 24VDC: 36,1708 36,1533 146,1533 146,1561.15 171,1586.15 171,1653 146,1678 146,1708
Bottom Layer:
  region net Net1_2: 124.7,438.55 111,424.85 111,303.85 120,294.85 243.3,294.85 288.57,249.57 492.43,249.57 528,214 528,127 533.5,121.5 597.5,121.5 604.5,128.5 604.5,227.5 492.66,339.34 342.51,339.34 243.3,438.55
  region net Net1_1: 124.7,241.7 111,228 111,107 120,98 245,98 264,117 479,117 492,130 492,218 486,224 261,224 243.3,241.7
  region net 24VDC: 97,538 31,604 31,982.68 146.01,982.68 146,677 177,646 792,646 1023,877 1345,877 1360.39,860 1360.39,810 1345,794.61 1095.61,794.61 839,538 625.88,537.12 591,502.24 591,433 586,428 542,428 539,431 539,515 500,554 413.8,554 397.8,538
  region net 24VDC: 31,1913 31,1378 31,713 146,713 146,1517 189.07,1560.07 189.07,1634.93 146,1678 146,1918 131,1933 51,1933
  region net NetC9_2: 1165,1693 1165,1822 1181,1838 1236,1838 1241,1843 1241,1905.17 1113.17,1905.17 1021,1813 1021,1693
  region net 24VDC: 1025,1567 1025,844.17 1074.56,794.61 1345,794.61 1360.39,810 1360.39,861.61 1345,877 1180.05,877 1167,890.05 1167,1664 1025,1664

## Silkscreen, mask and mechanical layers (free items; w line width, h text height)
Top Overlay:
  text "middlePCB REV3.0 / v.morais@fe.up.pt" at 3801,-17 h35 r90
  text "TOP" at 3469.73,-200.74 h60
Bottom Overlay:
  text "N" at 296,3543 h40 r180
  text "L" at 356,3543 h40 r180
  text "L" at 151,3403 h40 r270
  text "N" at 151,3343 h40 r270
  text "L" at 46,2756 h40 r270
  text "N" at 47,2566 h40 r270
  text "24V" at 267,495 h40
  text "0V" at 217,11 h40
  text "BOT" at 3621,-197 h60